# Altium PCB PCB2.pcbdoc
Units mil, origin at the board's own origin, x right, y up, seen from the top; angles counter-clockwise.
Board outline 1181.1 x 1181.1 mil, 4 copper layers (Top Layer, Inner1, Inner2, Bottom Layer), stack 5.512 mil thick; 117 components, 82 nets, 423 pads, 0 vias.
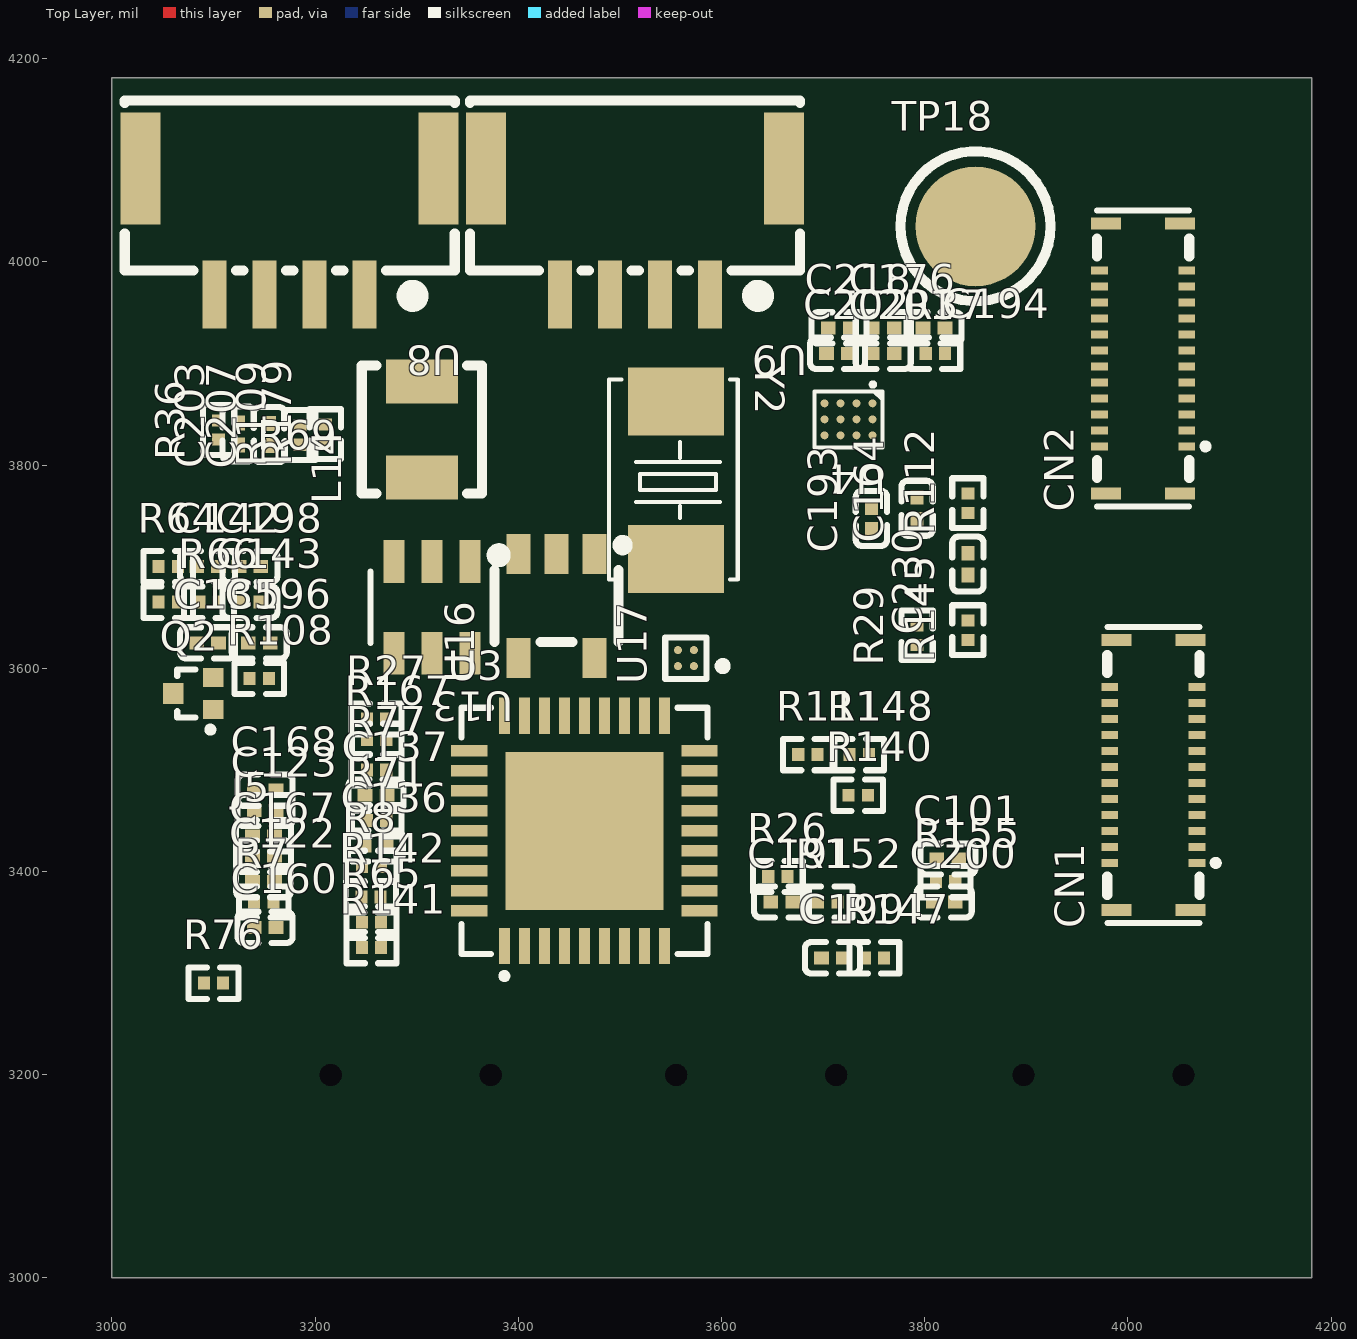
[diagram p0: Top Layer view]
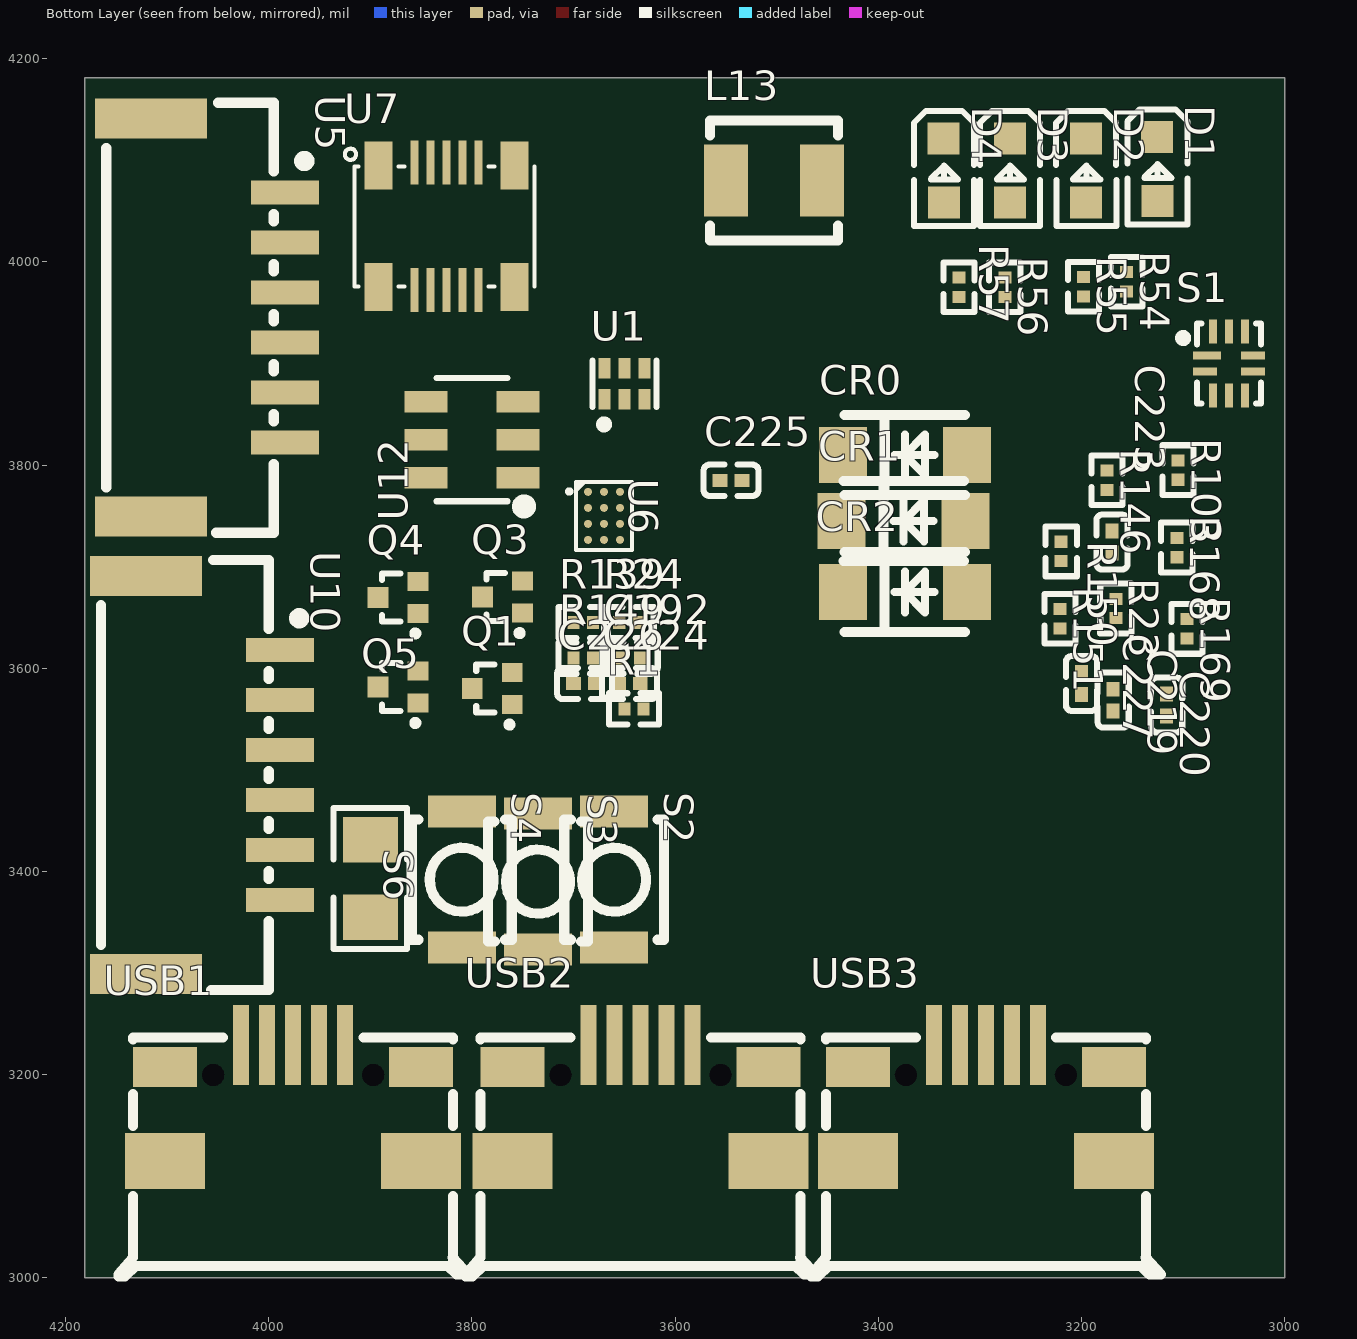
[diagram p1: Bottom Layer view, seen from below]

## Layer stack, top to bottom
Top Layer: signal copper 1.378
Inner1: signal copper 1.378
Inner2: signal copper 1.378
Bottom Layer: signal copper 1.378

## Board outline
3000,3000 4181.1,3000 4181.1,4181.1 3000,4181.1

## Components (designator, comment, footprint, x,y, rotation, side; value= is the part's Value field where it differs from the comment)
C101 "0.1uF" C0201 3822.74,3412.31 r0 top
C122 "0.1uF" C0201 3149.2,3390 r0 top
C123 "0.1uF" C0201 3150.8,3460 r0 top
C135 "0.1uF" C0201 3094.2,3625 r0 top
C136 "0.1uF" C0201 3259.2,3425 r0 top
C137 "47pF" C0201 3260,3475 r0 top
C142 "22pF" C0201 3094.2,3700 r0 top
C143 "47uF" C0201 3135.8,3665 r0 top
C160 "47uF" C0201 3150.8,3345 r0 top
C164 "0.1uF" C0201 3792.5,3757.5 r90 top
C167 "10uF" C0201 3149.2,3415 r0 top
C168 "10uF" C0201 3150.8,3480 r0 top
C176 "0.1uF" C0201 3759.2,3935 r0 top
C191 "4.7uF" C0201 3659.2,3370 r0 top
C192 "4.7uF" C0201 3644.2,3610 r180 bottom
C193 "4.7uF" C0201 3747.5,3747.5 r90 top
C194 "4.7uF" C0201 3809.2,3935 r0 top
C196 "47uF" C0201 3145,3625 r0 top
C198 "47uF" C0201 3135.8,3700 r0 top
C199 "4.7uF" C0201 3709.2,3315 r0 top
C200 "1.0uF" C0201 3819.2,3370 r0 top
C201 "0.1uF" C0201 3759.2,3910 r0 top
C202 "0.1uF" C0201 3714.2,3910 r0 top
C203 "0.1uF" C0201 3124.41,3830.59 r90 top
C207 "0.1uF" C0201 3155,3830 r90 top
C218 "4.7uF" C0201 3715.8,3935 r0 top
C219 "0.1uF" C0201 3168.9,3568.62 r270 bottom
C220 "0.1uF" C0201 3116.21,3563.79 r270 bottom
C223 "0.1uF" C0201 3170,3724.2 r270 bottom
C224 "18pF" C0201 3645,3585 r180 bottom
C225 "18pF" C0201 3545,3785 r180 bottom
C226 "1.0uF" C0201 3689.2,3585 r180 bottom
C227 "1.0uF" C0201 3200,3585 r270 bottom
C230 "4.7uF" C0201 3842.5,3702.5 r90 top
CN1 "CON24_0" CONN-SMD_BM20B-0.8-24DS-0.4V-51 4025,3495 r90 top
CN2 "CON24_0" CONN-SMD_BM20B-0.8-24DS-0.4V-51 4015,3905 r90 top
CR0 "SCHOTTKY" SOD-123FL_L2.8-W1.8-LS3.6-RD 3373.97,3810 r180 bottom
CR1 "SCHOTTKY" SOD-123FL_L2.8-W1.8-LS3.6-RD 3375,3745 r180 bottom
CR2 "SCHOTTKY" SOD-123FL_L2.8-W1.8-LS3.6-RD 3373.97,3675 r180 bottom
D1 "LED0" LED0603-RD-YELLOW 3125.44,4091.46 r270 bottom
D2 "LED0" LED0603-RD-YELLOW 3195.54,4089.96 r270 bottom
D3 "LED0" LED0603-RD-YELLOW 3270.54,4089.96 r270 bottom
D4 "LED0" LED0603-RD-YELLOW 3335.54,4089.96 r270 bottom
J5 "Header 2" C0201 3149.2,3435 r0 top
L13 "4.7uH" IND-SMD_L3.2-W3.0 3502.8,4080 r180 bottom
L14 "4.7uH" IND-SMD_L3.2-W3.0 3305,3835 r90 top
Q1 "nfet_zener_bidir" SOT-723-3_L1.2-W0.8-LS1.20-BR 3780,3580 r180 bottom
Q2 "nfet_zener_bidir" SOT-723-3_L1.2-W0.8-LS1.20-BR 3080,3575 r0 top
Q3 "nfet_zener_bidir" SOT-723-3_L1.2-W0.8-LS1.20-BR 3770,3670 r180 bottom
Q4 "nfet_zener_bidir" SOT-723-3_L1.2-W0.8-LS1.20-BR 3872.63,3669.63 r180 bottom
Q5 "nfet_zener_bidir" SOT-723-3_L1.2-W0.8-LS1.20-BR 3872.63,3581.55 r180 bottom
R1 "10K" R0201 3640.49,3560 r180 bottom
R7 "100K" R0201 3149.51,3370 r0 top
R8 "0" R0201 3255.49,3405 r0 top
R23 "12K" R0201 3166.21,3658.79 r270 bottom
R24 "1M" R0201 3645.49,3645 r180 bottom
R26 "0" R0201 3655.49,3395 r0 top
R27 "0" R0201 3260.49,3550 r0 top
R29 "0" R0201 3792.5,3632.5 r90 top
R36 "0" R0201 3105,3834.51 r90 top
R37 "0" R0201 3810.49,3910 r0 top
R54 "200" R0201 3155.54,3980.45 r270 bottom
R55 "200" R0201 3198,3975.53 r270 bottom
R56 "200" R0201 3275.54,3974.96 r270 bottom
R57 "200" R0201 3320.54,3974.96 r270 bottom
R64 "115K" R0201 3055.49,3700 r0 top
R65 "165K" R0201 3255.49,3350 r0 top
R66 "22.1K" R0201 3095.49,3665 r0 top
R69 "22.1K" R0201 3055.49,3665 r0 top
R71 "0" R0201 3260.49,3450 r0 top
R76 "100K" R0201 3100,3290 r0 top
R77 "0" R0201 3260.49,3500 r0 top
R103 "0" R0201 3105,3795 r270 bottom
R108 "Res1" R0201 3145,3590 r0 top
R109 "100K" R0201 3185,3829.51 r90 top
R111 "100K" R0201 3685,3515 r0 top
R112 "100K" R0201 3842.5,3762.5 r90 top
R139 "47K" R0201 3690.49,3645 r180 bottom
R140 "47K" R0201 3734.51,3475 r0 top
R141 "0" R0201 3255.49,3325 r0 top
R142 "0" R0201 3255,3375 r0 top
R145 "2K" R0201 3842.5,3637.5 r90 top
R146 "100K" R0201 3175,3785 r270 bottom
R147 "100K" R0201 3750.49,3315 r0 top
R148 "200" R0201 3735.49,3515 r0 top
R149 "100K" R0201 3690.49,3610 r180 bottom
R150 "100K" R0201 3220,3715 r270 bottom
R151 "27K" R0201 3221.21,3648.79 r270 bottom
R152 "100K" R0201 3704.51,3370 r0 top
R155 "47K" R0201 3820.49,3390 r0 top
R167 "0" R0201 3260.49,3530 r0 top
R168 "0" R0201 3106.21,3718.79 r270 bottom
R169 "0" R0201 3096.21,3638.79 r270 bottom
R179 "0" R0201 3210,3830.49 r90 top
S1 "TC7USB40MU" UQFN-10_L1.8-W1.4-P0.40-TL 3055,3900 r180 bottom
S2 "SW-PB" KEY-SMD_B3U-1000PM 3660,3391.9 r270 bottom
S3 "SW-PB" KEY-SMD_B3U-1000PM 3735,3390 r270 bottom
S4 "SW-PB" KEY-SMD_B3U-1000PM 3810,3391.9 r270 bottom
S6 "SW-SPST" R0805_NEW 3900,3393.04 r270 bottom
TP18 "TP" TESTPOINT-SMD_BD2.5 3850,4035 r0 top
U1 "TPD4S012" SON-6_L1.5-W1.0-P0.50-BL 3650,3880 r180 bottom
U3 "USB2513BI-AEZG" QFN-36_L6.0-W6.0-P0.50-BL-EP 3465,3440 r0 top
U4 "TPD4S214YFFR" DSBGA-12_L1.7-W1.4-R3-C4-P0.40-BL 3725,3845 r180 top
U5 "WAFER-GH1.25-6PLB" CONN-SMD_6P-P1.25_XUNPU_WAFER-GH1.25-6PLB 4050,3945 r270 bottom
U6 "TPD4S214YFFR" DSBGA-12_L1.7-W1.4-R3-C4-P0.40-BL 3670,3750 r270 bottom
U7 "AXT510124" CONN-SMD_10P-P0.40_AXT510124 3825,4035 r180 bottom
U8 "WAFER-GH1.25-4PWB" CONN-SMD_4P-P1.25_XUNPU_WAFER-GH1.25-4PWB 3175,4030 r180 top
U9 "WAFER-GH1.25-4PWB" CONN-SMD_4P-P1.25_XUNPU_WAFER-GH1.25-4PWB 3515,4030 r180 top
U10 "WAFER-GH1.25-6PLB" CONN-SMD_6P-P1.25_XUNPU_WAFER-GH1.25-6PLB 4055,3495 r270 bottom
U12 "SY8104ADC" SOT-23-6_L2.9-W1.6-P0.95-LS2.8-BL 3800,3825 r90 bottom
U13 "SY8104ADC" SOT-23-6_L2.9-W1.6-P0.95-LS2.8-BL 3315,3660 r180 top
U16 "TPS79333DBVR" SOT-23-5_L3.0-W1.7-P0.95-LS2.8-BR 3437.6,3661.18 r90 top
U17 "FPF1203LUCX" WLCSP-4_L0.85-W0.85-R2-C2-P0.40-BL 3565,3610 r90 top
USB1 "MicroQTJ" MICRO-USB-SMD_MICROQTJ 3975.98,3172.18 r180 bottom
USB2 "MicroQTJ" MICRO-USB-SMD_MICROQTJ 3634.02,3172.18 r180 bottom
USB3 "MicroQTJ" MICRO-USB-SMD_MICROQTJ 3294.02,3172.18 r180 bottom
Y2 "XTAL" SMD-5032_2P 3555,3785 r270 top

## Footprints (in the part's own frame and the unit in brackets; to place one, negate y for a bottom-side part, rotate by r counter-clockwise, add the part's x,y. Pads: shape width x height; smd on the part's side, far side on the other; paste and mask are expansions set on the pad)
C0201 [mil]
  rect 14.51x12.76 smd: 1(-10.8,0) 2(10.8,0)
  silkscreen extent -27,-15 27,15
CONN-SMD_4P-P1.25_XUNPU_WAFER-GH1.25-4PWB [mm]
  rect 0.6x1.7 smd: 1(-1.875,1.575) 2(-0.625,1.575) 3(0.625,1.575) 4(1.875,1.575)
  rect 1x2.8 smd: 5(3.725,-1.575) 6(-3.725,-1.575)
  silkscreen extent -4.13,-3.27 4.12,1.81
CONN-SMD_6P-P1.25_XUNPU_WAFER-GH1.25-6PLB [mm]
  rect 0.6x1.7 smd: 1(-3.125,1.675) 2(-1.875,1.675) 3(-0.625,1.675) 4(0.625,1.675) 5(1.875,1.675) 6(3.125,1.675)
  rect 1x2.8 smd: 7(4.975,-1.675) 8(-4.975,-1.675)
  silkscreen extent -5.38,-2.79 5.37,2.29
CONN-SMD_10P-P0.40_AXT510124 [mm]
  rect 0.7x1.2 smd: 0(-1.7,-1.521) 0(-1.7,1.521) 0(1.7,-1.521) 0(1.7,1.521)
  rect 0.2x1.1 smd: 1(-0.8,1.596) 2(-0.8,-1.596) 3(-0.4,1.596) 4(-0.4,-1.596) 5(0,1.596) 6(0,-1.596) 7(0.4,1.596) 8(0.4,-1.596) 9(0.8,1.596) 10(0.8,-1.596)
  silkscreen extent -2.54,-1.5 2.2,1.94
CONN-SMD_BM20B-0.8-24DS-0.4V-51 [mil]
  rect 7.9x16.5 smd: 1(-86.6,-42.9) 2(-86.6,42.9) 3(-70.9,-42.9) 4(-70.9,42.9) 5(-55.1,-42.9) 6(-55.1,42.9) 7(-39.4,-42.9) 8(-39.4,42.9) 9(-23.6,-42.9) 10(-23.6,42.9) 11(-7.9,-42.9) 12(-7.9,42.9) 13(7.9,-42.9) 14(7.9,42.9) 15(23.6,-42.9) 16(23.6,42.9) 17(39.4,-42.9) 18(39.4,42.9) 19(55.1,-42.9) 20(55.1,42.9) 21(70.9,-42.9) 22(70.9,42.9) 23(86.6,-42.9) 24(86.6,42.9)
  rect 11.8x29.5 smd: 25(132.9,-36.4) 26(132.9,36.4) 27(-132.9,-36.4) 28(-132.9,36.4)
  silkscreen extent -146,-64 146,45
DSBGA-12_L1.7-W1.4-R3-C4-P0.40-BL [mm]
  round 0.2 smd: A1(-0.6,-0.4) A2(-0.6,0) A3(-0.6,0.4) B1(-0.2,-0.4) B2(-0.2,0) B3(-0.2,0.4) C1(0.2,-0.4) C2(0.2,0) C3(0.2,0.4) D1(0.6,-0.4) D2(0.6,0) D3(0.6,0.4)
  silkscreen extent -0.85,-0.92 0.85,0.7
IND-SMD_L3.2-W3.0 [mil]
  rect 43.3x70.9 smd: 1(-47.2,0) 2(47.2,0)
  silkscreen extent -63,-59 63,59
KEY-SMD_B3U-1000PM [mil]
  rect 31.5x66.9 smd: 1(-66.9,0) 2(66.9,0)
  silkscreen extent -59,-49 59,49
LED0603-RD-YELLOW [mil]
  rect 31.5x31.5 smd: 1(-31.5,-0.1) 2(31.5,0.1)
  silkscreen extent -59,-29 55,30
MICRO-USB-SMD_MICROQTJ [mm]
  rect 0.4x2 smd: 1(-1.3,1.452) 2(-0.65,1.452) 3(0,1.452) 4(0.65,1.452) 5(1.3,1.452)
  rect 1.6x1 smd: 6(-3.2,0.902) 9(3.2,0.902)
  rect 2x1.4 smd: 7(-3.2,-1.452) 8(3.2,-1.452)
  Multi-Layer board cut-out: -2.275,0.698 -2.248,0.817 -2.172,0.913 -2.061,0.966 -1.939,0.966 -1.829,0.913 -1.752,0.817 -1.725,0.698 -1.725,0.698 -1.752,0.579 -1.829,0.483 -1.939,0.43 -2.061,0.43 -2.172,0.483 -2.248,0.579 -2.275,0.698
  Multi-Layer board cut-out: 1.725,0.698 1.752,0.817 1.828,0.913 1.939,0.966 2.061,0.966 2.171,0.913 2.248,0.817 2.275,0.698 2.275,0.698 2.248,0.579 2.171,0.483 2.061,0.43 1.939,0.43 1.828,0.483 1.752,0.579 1.725,0.698
  silkscreen extent -4.37,-4.34 4.38,1.63
QFN-36_L6.0-W6.0-P0.50-BL-EP [mm]
  rect 0.28x0.905 smd: 1(-2,-2.878) 2(-1.5,-2.878) 3(-1,-2.878) 4(-0.5,-2.878) 5(0,-2.878) 6(0.5,-2.878) 7(1,-2.878) 8(1.5,-2.878) 9(2,-2.878) 19(2,2.878) 20(1.5,2.878) 21(1,2.878) 22(0.5,2.878) 23(0,2.878) 24(-0.5,2.878) 25(-1,2.878) 26(-1.5,2.878) 27(-2,2.878)
  rect 0.905x0.28 smd: 10(2.878,-2) 11(2.878,-1.5) 12(2.878,-1) 13(2.878,-0.5) 14(2.878,0) 15(2.878,0.5) 16(2.878,1) 17(2.878,1.5) 18(2.878,2) 28(-2.878,2) 29(-2.878,1.5) 30(-2.878,1) 31(-2.878,0.5) 32(-2.878,0) 33(-2.878,-0.5) 34(-2.878,-1) 35(-2.878,-1.5) 36(-2.878,-2)
  rect 3.95x3.95 smd: 37(0,0)
  silkscreen extent -3.08,-3.7 3.08,3.08
R0201 [mil]
  rect 11.93x12.76 smd: 1(-9.51,0) 2(9.51,0)
  silkscreen extent -24,-15 24,15
R0805_NEW [mil]
  rect 44.59x54.21 smd: 1(-38.04,0) 2(38.04,0)
  silkscreen extent -69,-36 69,36
SMD-5032_2P [mil]
  rect 66.9x94.5 smd: 1(-77.6,0) 2(77.6,0)
  silkscreen extent -99,-66 98,61
SOD-123FL_L2.8-W1.8-LS3.6-RD [mm]
  rect 1.2x1.4 smd: 1(-1.55,0) 2(1.55,0)
  silkscreen extent -1.5,-1 1.5,1
SON-6_L1.5-W1.0-P0.50-BL [mil]
  rect 11.8x20.5 smd: 1(-19.7,-15.2) 2(0,-15.2) 3(19.7,-15.2) 4(19.7,15.2) 5(0,15.2) 6(-19.7,15.2)
  silkscreen extent -32,-44 32,23
SOT-23-5_L3.0-W1.7-P0.95-LS2.8-BR [mm]
  rect 1x0.6 smd: 1(1.3,-0.95) 2(1.3,0) 3(1.3,0.95) 4(-1.3,0.95) 5(-1.3,-0.95)
  silkscreen extent -0.9,-1.78 1.65,1.55
SOT-23-6_L2.9-W1.6-P0.95-LS2.8-BL [mil]
  rect 20.95x42.2 smd: 1(-37.4,-45.24) 2(0,-45.24) 3(37.4,-45.24) 4(37.4,45.24) 5(0,45.24) 6(-37.4,45.24)
  silkscreen extent -72,-57 61,35
SOT-723-3_L1.2-W0.8-LS1.20-BR [mil]
  rect 20.5x18.5 smd: 1(19.7,-15.7) 2(19.7,15.8)
  rect 20.5x20.5 smd: 3(-19.7,0)
  silkscreen extent -16,-38 20,24
TESTPOINT-SMD_BD2.5 [mm]
  round 3 smd: 1(0,0)
  silkscreen extent -1.88,-1.87 1.88,1.87
UQFN-10_L1.8-W1.4-P0.40-TL [mil]
  rect 27.6x7.9 smd: 1(-21.6,7.9)
  rect 23.6x7.9 smd: 2(-23.6,-7.9) 6(23.6,-7.9) 7(23.6,7.9)
  rect 7.9x23.6 smd: 3(-15.7,-31.5) 4(0,-31.5) 5(15.8,-31.5) 8(15.8,31.5) 9(0,31.5) 10(-15.7,31.5)
  silkscreen extent -49,-39 32,39
WLCSP-4_L0.85-W0.85-R2-C2-P0.40-BL [mm]
  round 0.2 smd: A1(-0.2,-0.2) A2(-0.2,0.2) B1(0.2,-0.2) B2(0.2,0.2)
  silkscreen extent -0.52,-1.02 0.52,0.52

## Nets (pads, with @x,y where several pads share a name; then routed paths per layer and width w, separated by ;. In a path a pad name is that pad's centre, name@x,y a point inside that pad or via, vN(x,y) a via of type N, cw(c..) or ccw(c..) an arc to the next point about the centre after c; other vN are vias at no path point)
$2N1522: C207.2 R26.2 R152.1 U3.26
$2N1539: R141.2 R142.2 R149.2 U4.C1 U6.C1
$2N1542: R109.1 R111.2 U3.25
$2N1543: C224.2 R24.1 U3.32 Y2.1
$2N1544: R148.1 S6.1
$2N1545: R112.2 U3.24
$2N1547: C225.2 R24.2 U3.33 Y2.2
$2N1564: R23.2 U3.35
$2N1565: Q1.3 R37.1 R150.1
$2N1566: TP18.1 U3.22
$2N1573: R36.2 R37.2 U17.B2
$2N1574: R103.2 S1.8
$2N1575: R140.2 U4.D1
$2N1577: R139.2 U6.D1
$2N1578: C218.2 R147.2 R169.1 U1.6 U17.A2 USB1.1
$2N1589: C176.2 U3.34
$2N1590: C164.2 U3.14
$2N1603: R1.1 R179.2 U3.27
$2N1610: R29.1 U4.A2
$2N1611: C191.1 R167.1 U4.A3 U4.B3 USB3.1
$2N1614: R27.1 U6.A2
$2N1615: C192.1 R168.1 U6.A3 U6.B3 USB2.1
$3N529: C122.2 C123.2 C167.2 C168.2 R8.1 R71.1 R77.2 U12.4 U13.4
$3N530: R71.2 R76.2 U12.2
$3N531: R7.2 R8.2 U13.2
$3N532: C142.1 R64.1 R69.2 U12.1
$3N533: C135.1 L13.1 U12.5
$3N534: C135.2 U12.6
$3N535: C137.1 R65.1 R66.2 U13.1
$3N536: C136.1 L14.1 U13.5
$3N537: C136.2 U13.6
$5N395: D4.1 R57.2
$5N396: D2.1 R55.2
$5N397: D3.1 R56.2
$5N398: D1.1 R54.2
$5N399: D4.2 Q5.2
$5N400: D3.2 Q4.2
$5N401: D2.2 Q3.2
$5N402: D1.2 Q2.2
DCIN: J5.2 R77.1
GND: C101.1 C122.1 C123.1 C143.1 C160.1 C164.1 C167.1 C168.1 C176.1 C191.2 C192.2 C193.1 C194.1 C196.1 C198.1 C199.1 C200.1 C201.1 C202.1 C203.2 C207.1 C218.1 C219.1 C220.1 C223.1 C224.1 C225.1 C226.1 C227.1 C230.1 CN1.12 CN1.14 CN1.17 CN1.25 CN1.26 CN1.27 CN1.28 CN2.25 CN2.26 CN2.27 CN2.28 CR0.2 CR1.2 CR2.2 J5.1 Q1.2 Q2.3 Q3.3 Q4.3 Q5.3 R7.1 R23.1 R27.2 R29.2 R66.1 R69.1 R76.1 R103.1 R111.1 R112.1 R139.1 R140.1 R149.1 R151.1 R155.1 S1.4 S2.2 S3.2 S4.2 U1.4 U3.37 U4.C2 U4.C3 U5.6 U5.7 U5.8 U6.C2 U6.C3 U7.0 U7.2 U7.4 U7.6 U7.8 U7.10 U8.4 U8.5 U8.6 U9.4 U9.5 U9.6 U10.6 U10.7 U10.8 U12.3 U13.3 U16.2 U17.B1 USB1.5 USB1.6 USB1.7 USB1.8 USB1.9 USB2.5 USB2.6 USB2.7 USB2.8 USB2.9 USB3.5 USB3.6 USB3.7 USB3.8 USB3.9
I2C0_SCL: CN1.8 U9.3
I2C0_SDA: CN1.7 U9.2
KEY_VOLP_N: CN2.6 CR2.1 S4.1
PHONE_ON_N: CN2.5 CR0.1 S2.1
PM_RESIN_N: CN2.7 CR1.1 S3.1
PRE_BUCK_OUT: C142.2 C143.2 C196.2 CN1.23 L13.2 R64.2 R108.1
SPI1_CLK: CN1.13 U5.5
SPI1_CS_N: CN1.11 U5.4
SPI1_MISO: CN1.10 U5.3
SPI1_MOSI: CN1.9 U5.2
SYS_5P0: C137.2 C160.2 C193.2 C194.2 C198.2 L14.2 R65.2 R142.1 R167.2 R168.2 U4.A1 U4.B1 U6.A1 U6.B1
UART0_CTS_N: CN1.3 U10.4
UART0_RTS_N: CN1.4 U10.5
UART0_RX: CN1.2 U10.3
UART0_TX: CN1.1 U10.2
UART1_RX: CN1.6 U8.3
UART1_TX: CN1.5 U8.2
USB_HS_D_M: CN1.16 S1.5
USB_HS_D_M_DEVICE: S1.7 U1.2 USB1.2
USB_HS_D_M_EXP: U3.6
USB_HS_D_M_HOST1: U3.3 U6.D2 USB2.2
USB_HS_D_M_HOST2: U3.1 U4.D2 USB3.2
USB_HS_D_M_HUB: S1.6 U3.30
USB_HS_D_P: CN1.15 S1.3
USB_HS_D_P_DEVICE: S1.1 U1.1 USB1.3
USB_HS_D_P_EXP: U3.7
USB_HS_D_P_HOST1: U3.4 U6.D3 USB2.3
USB_HS_D_P_HOST2: U3.2 U4.D3 USB3.3
USB_HS_D_P_HUB: S1.2 U3.31
USB_HS_ID: CN1.24 R146.1 R147.1 R155.2
USB_HUB_RESET_N_PM: CN1.22 R26.1
USB_SW_SEL: Q1.1 R36.1 R141.1 R145.2 R151.2 R179.1 S1.10 S6.2
USB_SW_SEL_PM: CN1.21 R145.1
USB_VBUS_IN: C230.2 CN1.20 R146.2 R169.2 U17.A1
USR_LED_1_CTRL: CN2.1 Q5.1
USR_LED_2_CTRL: CN2.2 Q4.1
USR_LED_3_CTRL: CN2.3 Q3.1
USR_LED_4_CTRL: CN2.4 Q2.1
VPH_PWR: C203.1 C226.2 R54.1 R55.1 R56.1 R57.1 R108.2 R148.2 R150.2 S1.9 U5.1 U7.1 U7.3 U7.5 U7.7 U7.9 U8.1 U9.1 U10.1 U16.1 U16.3
VREG_HUB_3P3: C101.2 C199.2 C200.2 C201.2 C202.2 C219.2 C220.2 C223.2 C227.2 R1.2 R109.2 R152.2 U3.5 U3.10 U3.15 U3.23 U3.29 U3.36 U16.5
"": CN1.18 CN1.19 CN2.8 CN2.9 CN2.10 CN2.11 CN2.12 CN2.13 CN2.14 CN2.15 CN2.16 CN2.17 CN2.18 CN2.19 CN2.20 CN2.21 CN2.22 CN2.23 CN2.24 U1.3 U1.5 U3.8 U3.9 U3.11 U3.12 U3.13 U3.16 U3.17 U3.18 U3.19 U3.20 U3.21 U3.28 U4.B2 U6.B2 U16.4 USB1.4 USB2.4 USB3.4

## Silkscreen, mask and mechanical layers (free items; w line width, h text height)
Mechanical 1:
  the board outline again, w10